# Altium PCB PCB1.PcbDoc
Units mil, origin at the board's own origin, x right, y up, seen from the top; angles counter-clockwise.
Board outline 3385.83 x 2125.98 mil, 2 copper layers (Top Layer, Bottom Layer), stack 34.296 mil thick; 5 components, 5 nets, 17 pads, 0 vias.
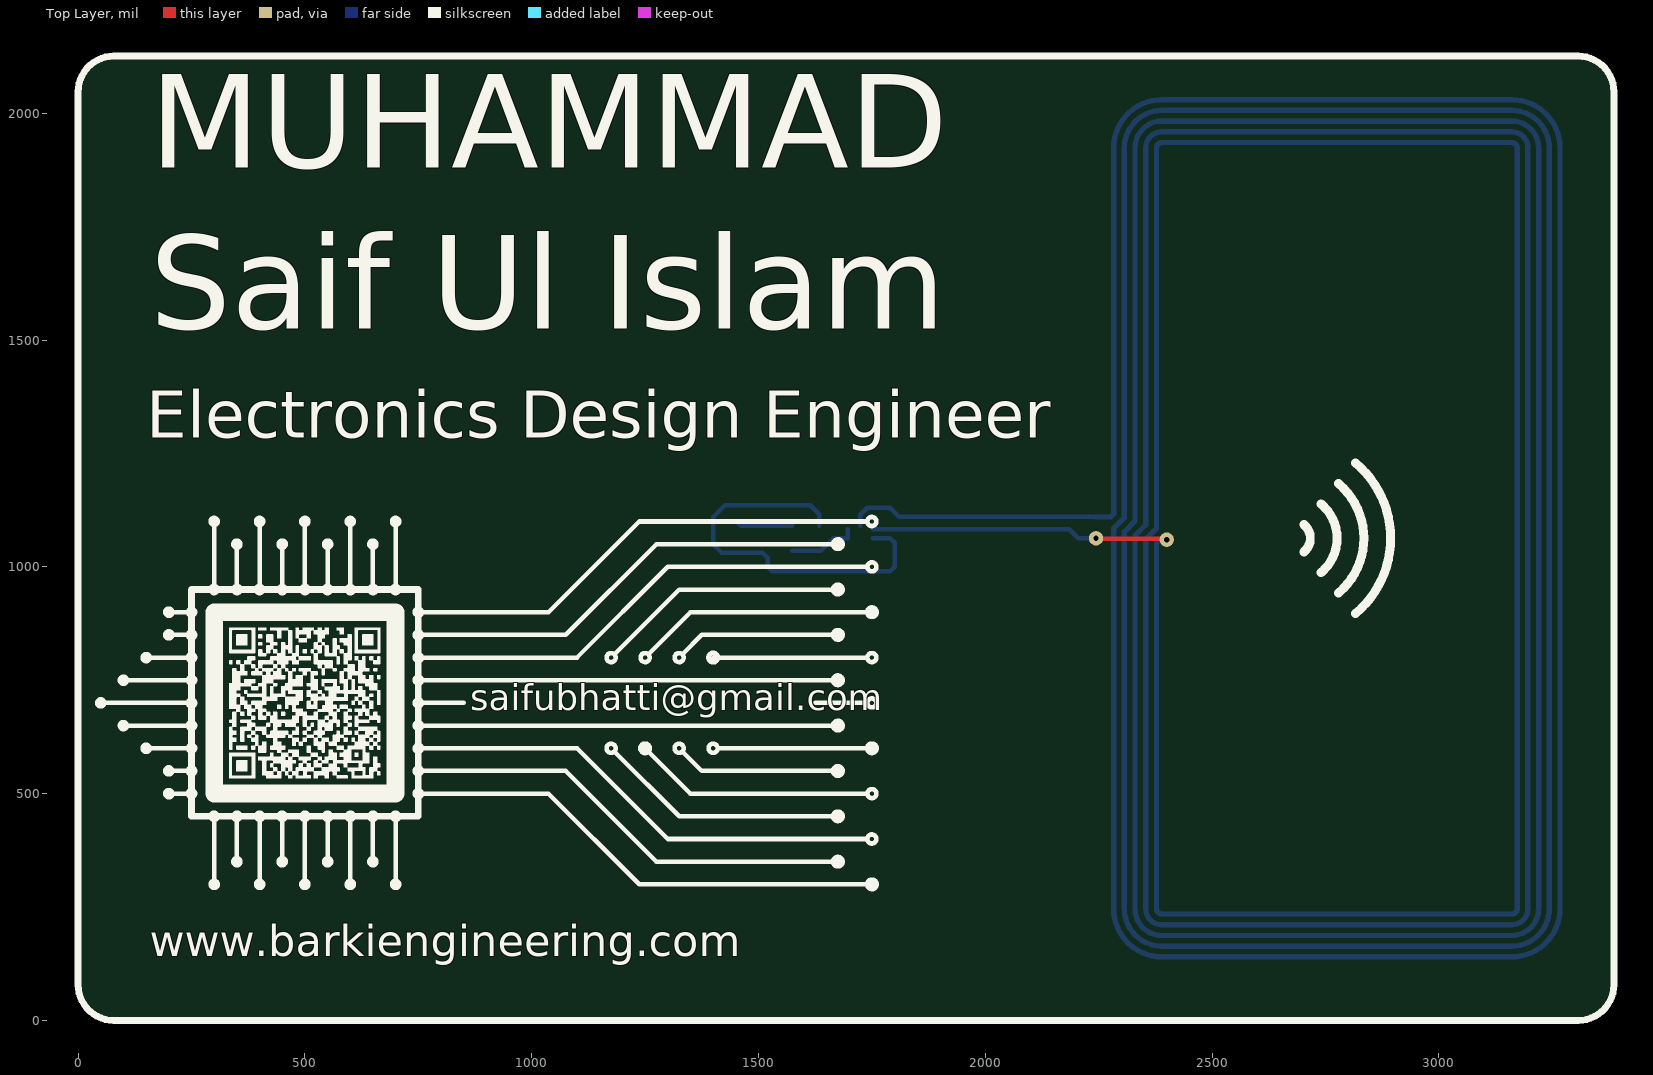
[diagram p0: Top Layer view]
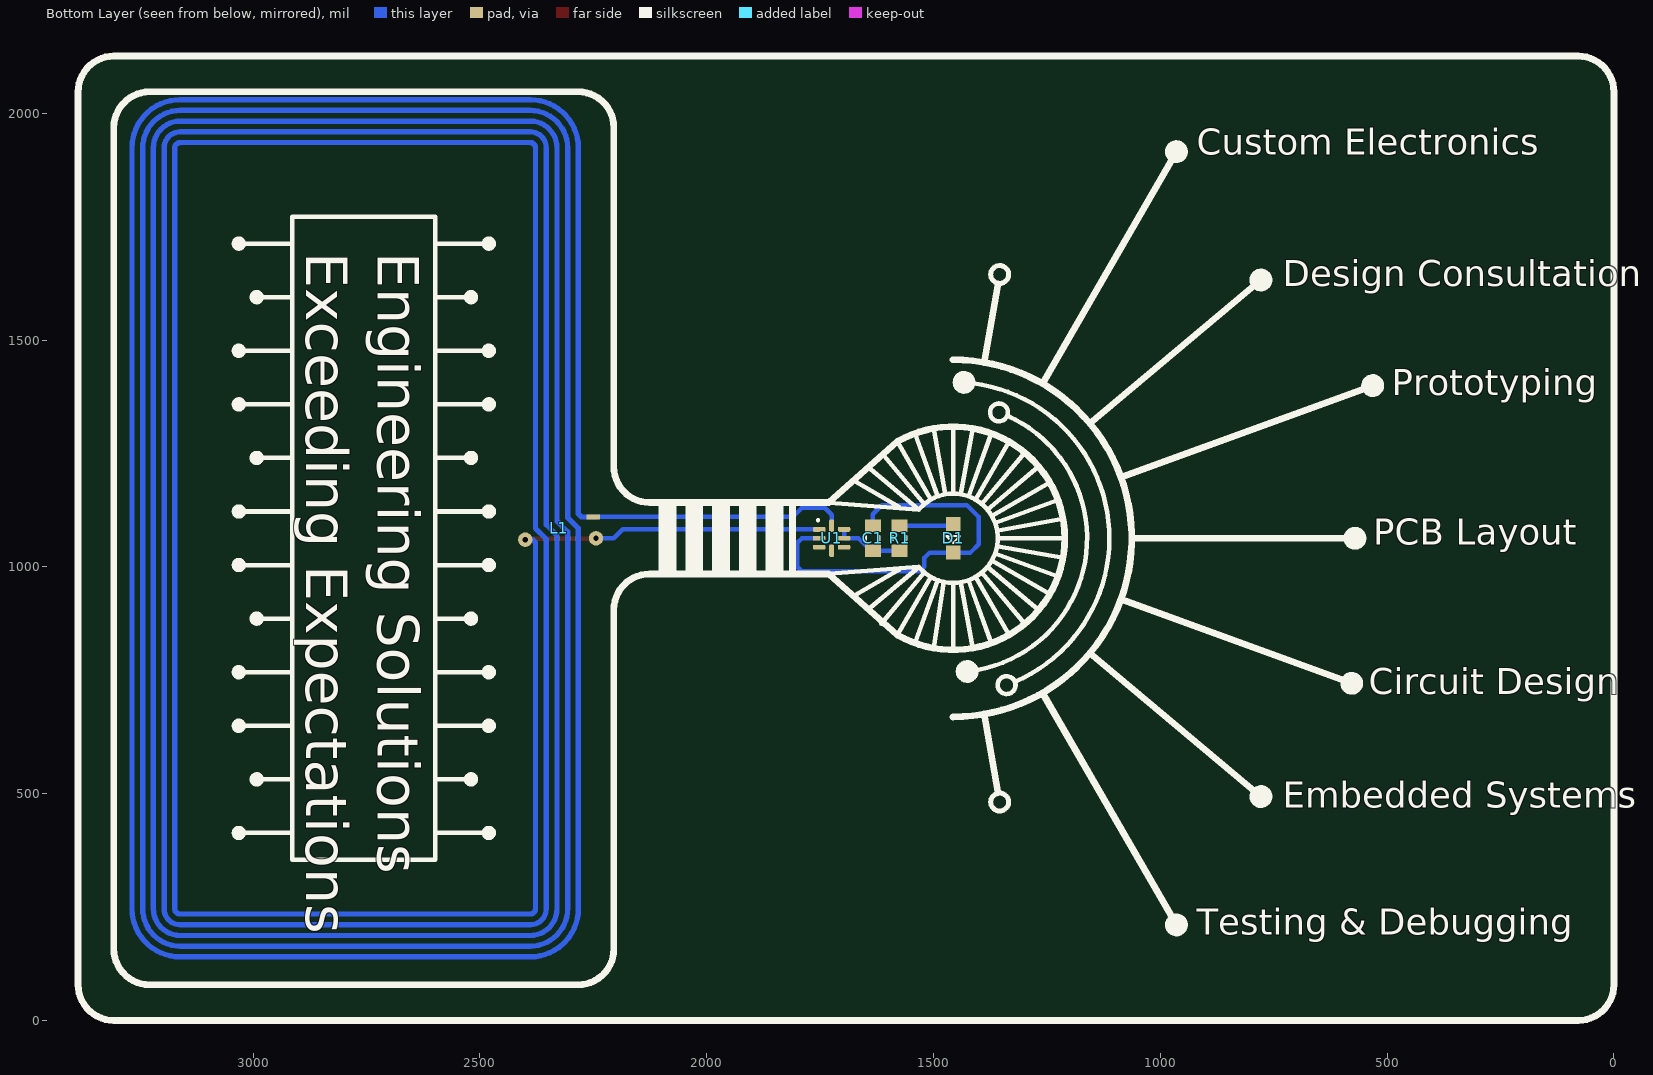
[diagram p1: Bottom Layer view, seen from below]
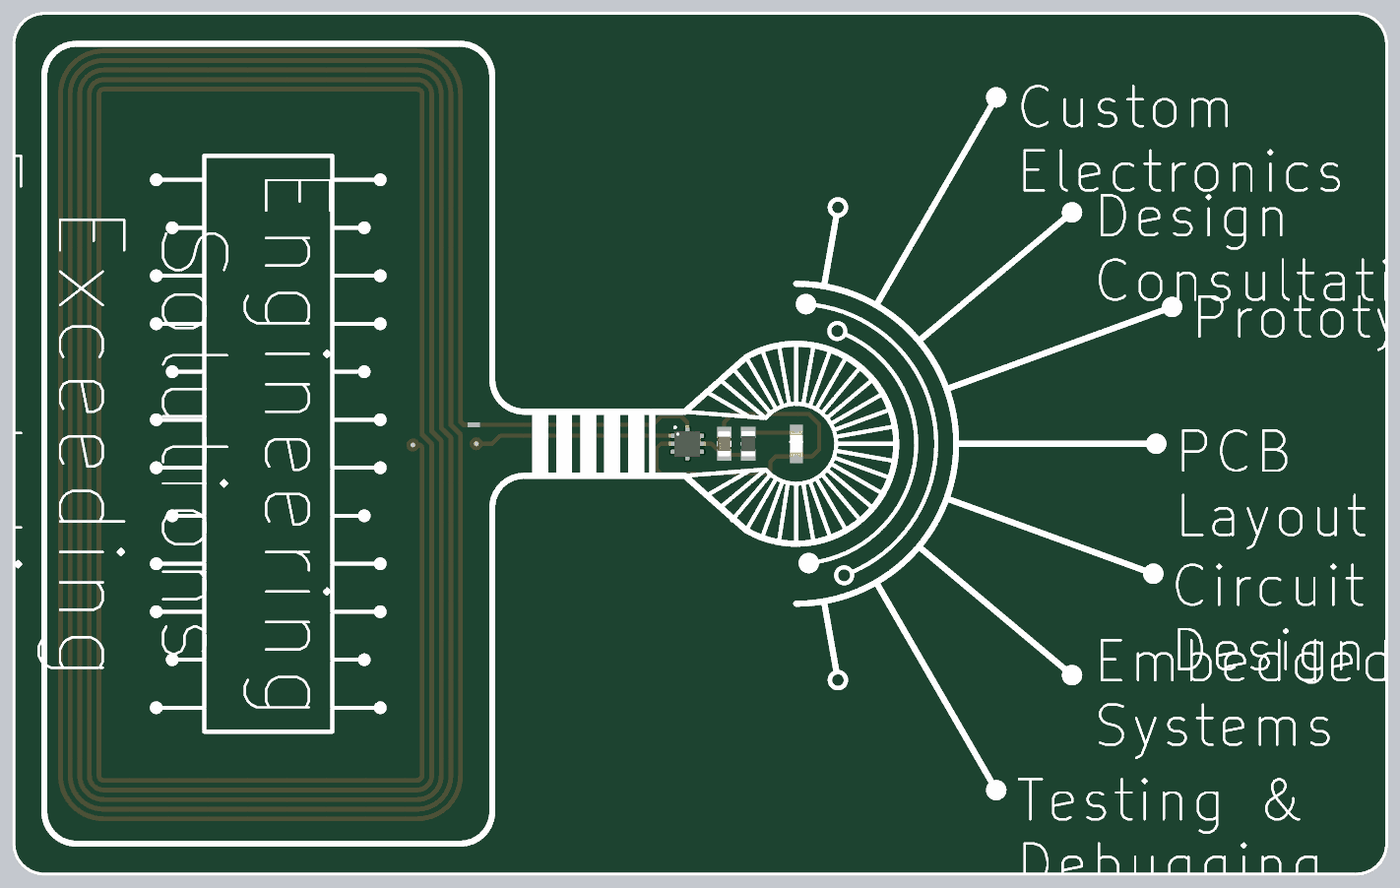
[diagram p2: 3D render of the assembled board from below, using the file's embedded part models]

## Layer stack, top to bottom
Top Solder: solder mask 0.4, Solder Resist, Dk 3.5
Top Layer: signal copper 1.4
Dielectric 1: dielectric 31.4961, FR-4, Dk 4.8
Bottom Layer: signal copper 1.4
Bottom Solder: solder mask 0.4, Solder Resist, Dk 3.5

## Board outline
0,78.74 0,2047.24 cw(c78.74,2047.24) 78.74,2125.98 3307.09,2125.98 cw(c3307.09,2047.24) 3385.83,2047.24 3385.83,78.74 cw(c3307.09,78.74) 3307.09,0 78.74,0 cw(c78.74,78.74)

## Design rules (kind name [scope] priority, off if disabled: settings)
Clearance [All] p1: gap=6 ignorepadtopadclearanceinfootprint=TRUE
MinimumSolderMaskSliver [All] p1: minsoldermaskwidth=0
PolygonConnect [All] p1: connectstyle=Relief reliefconductorwidth=10 reliefentries=4 polygonreliefangle="90 Angle" airgapwidth=10
RoutingVias [All] p1: holewidth=28 width=50 viastyle="Through Hole" minholewidth=28 minwidth=50 maxholewidth=28 maxwidth=50
SilkToSolderMaskClearance [IsPad] p1: minsilkscreentomaskgap=3 clearancetoexposedcopper=TRUE
SolderMaskExpansion [All] p1: expansion=4 istentingtop=FALSE
Width [All] p1: maxlimit=196.85 minlimit=5 preferedwidth=10
28 further rules are at their usual default settings.

## Components (designator, comment, footprint, x,y, rotation, side; value= is the part's Value field where it differs from the comment)
C1 "0.1uF" C_0603 1633.86,1062.99 r270 bottom
D1 "Yellow" LED_0603 1456.69,1062.99 r270 bottom
L1 "NFC Antenna" 25X48MM_NFC_ANTENNA 2775,1085 r270 bottom locked
R1 "47R" R_0603 1574.8,1062.99 r270 bottom
U1 "NT3H2111W0FHKH" XFQFN-8 1724.61,1062.99 r180 bottom

## Footprints (in the part's own frame and the unit in brackets; to place one, negate y for a bottom-side part, rotate by r counter-clockwise, add the part's x,y. Pads: shape width x height; smd on the part's side, far side on the other; paste and mask are expansions set on the pad)
25X48MM_NFC_ANTENNA [mil]
  rect 11.81x29.53 smd mask+4: 1(-25,525)
  round 31.81 hole 11.81 mask+4: 2(25,375)
  Top Layer lines w11.81: -25,530 -25,525 -25,498.62 -31.5,492.13 -838.58,492.13 ccw(c-838.58,385.83) -944.88,385.83 -944.88,-385.83 ccw(c-838.58,-385.83) -838.58,-492.13 838.58,-492.13 ccw(c838.58,-385.83) 944.88,-385.83 944.88,385.83 ccw(c838.58,385.83) 838.58,492.13 0,492.13 -23.62,468.5 -838.58,468.5 ccw(c-838.58,385.82) -921.26,385.83 -921.26,-385.83 ccw(c-838.59,-385.82) -838.58,-468.5 838.58,-468.5 ccw(c838.58,-385.82) 921.26,-385.83 921.26,385.83 ccw(c838.59,385.82) 838.58,468.5 7.87,468.5 -15.75,444.88 -838.58,444.88 ccw(c-838.58,385.82) -897.64,385.83 -897.64,-385.83 ccw(c-838.59,-385.82) -838.58,-444.88 838.58,-444.88 ccw(c838.58,-385.82) 897.64,-385.83 897.64,385.83 ccw(c838.59,385.82) 838.58,444.88 15.75,444.88 -7.87,421.26 -838.58,421.26 ccw(c-838.58,385.82) -874.02,385.83 -874.02,-385.83 ccw(c-838.59,-385.82) -838.58,-421.26 838.58,-421.26 ccw(c838.58,-385.82) 874.02,-385.83 874.02,385.83 ccw(c838.59,385.82) 838.58,421.26 23.62,421.26 0,397.64 -838.58,397.64 ccw(c-838.58,385.83) -850.39,385.83 -850.39,-385.83 ccw(c-838.58,-385.83) -838.58,-397.64 838.58,-397.64 ccw(c838.58,-385.83) 850.39,-385.83 850.39,385.83 ccw(c838.58,385.83) 838.58,397.64 31.5,397.64 25,391.14 25,375
C_0603 [mm]
  rect 0.7x0.9 smd paste+0 mask+0: 1(-0.7,0) 2(0.7,0)
  silkscreen extent -0.13,-0.38 0.13,0.38, body extent -0.8,-0.4 0.8,0.4, height 1
LED_0603 [mm]
  rect 0.8x0.8 smd paste+0 mask+0: 1(-0.8,0) 2(0.8,0)
  silkscreen extent -0.13,-0.38 0.25,0.38, body extent -0.8,-0.4 0.8,0.4, height 0.7
R_0603 [mm]
  rect 0.7x0.9 smd paste+0 mask+0: 1(-0.7,0) 2(0.7,0)
  silkscreen extent -0.13,-0.39 0.09,0.38, body extent -0.77,-0.43 0.77,0.43, height 0.5
XFQFN-8 [mm]
  rrect54% 0.71x0.27 smd: 1(-0.695,0.5) 2(-0.695,0)
  rrect54% 0.7x0.27 smd: 3(-0.695,-0.5) 5(0.695,-0.5) 6(0.695,0) 7(0.695,0.5)
  rrect54% 0.27x0.7 smd: 4(0,-0.695) 8(0,0.695)
  silkscreen extent -0.78,1 -0.74,1.04, body extent -0.8,-0.8 0.8,0.8, height 0.5

## Part data
C1: library part "Cap 0.1uF 50V 10% X7R 0603", "Ceramic Capacitor 0.1uF 10% X7R 50V 0603 T/R", Manufacturer=Samsung, Manufacturer Part Number=CL10B104KB8WPND, Supplier Part Number 1=187-CL10B104KB8WPND, Category="Ceramic Capacitors", Pricing 1="1=0.10000, 10=0.03400, 50=0.03400, 100=0.02600, 1000=0.01500, 10000=0.01100 (USD)", RoHS=Yes, RoHS Compliant=Yes, Stock 1=31698, Supplier 1=Mouser
D1: library part "LED Yellow 2V 20mA 0603", "APT1608SYCK Yellow LED; 590 nm 1608 (0603) Clear; Rectangle Lens SMD package", Case Code (Imperial)=0603, Case Code (Metric)=1608, Forward Current=20mA, Forward Voltage=2V, Lens Color=Clear, Manufacturer=Kingbright, Manufacturer Part Number=APT1608SYCK, Max Operating Temperature=85°C, Min Operating Temperature=-40°C, Package Quantity=2000, Supplier Part Number 1=754-1124-1-ND, Case/Package=0603, Category=LEDs, Color=Yellow, ComponentLink1Description=https://datasheet.ciiva.com/2113/apt1608syck-2113824.pdf?src-supplier=Digi-Key, ComponentLink1URL=https://datasheet.ciiva.com/2113/apt1608syck-2113824.pdf?src-supplier=Digi-Key, ComponentLink2Description=https://datasheet.ciiva.com/4688/apt1608syck-35136-4688900.pdf?src-supplier=Mouser, ComponentLink2URL=https://datasheet.ciiva.com/4688/apt1608syck-35136-4688900.pdf?src-supplier=Mouser, ComponentLink3Description=https://datasheet.ciiva.com/2113/apt1608syck-2113825.pdf?src-supplier=Digi-Key, ComponentLink3URL=https://datasheet.ciiva.com/2113/apt1608syck-2113825.pdf?src-supplier=Digi-Key, ComponentLink4Description=https://datasheet.ciiva.com/2113/apt1608syck-2113826.pdf?src-supplier=Digi-Key, ComponentLink4URL=https://datasheet.ciiva.com/2113/apt1608syck-2113826.pdf?src-supplier=Digi-Key, ComponentLink5Description=https://datasheet.ciiva.com/14603/70062842-14603786.pdf?src-supplier=Allied+Electronics, ComponentLink5URL=https://datasheet.ciiva.com/14603/70062842-14603786.pdf?src-supplier=Allied+Electronics, Dominant Wavelength=590nm, Height=0.75mm, Illumination Color=Yellow, Lead Free="Lead Free", Length=1.6mm, Lens Style=Clear,Flat, Luminous Intensity=150mcd, Mounting Technology="Surface Mount", Number of LEDs=1, Packaging="Tape and Reel", Pins=2, Pricing 1="1=0.29000, 10=0.22800, 100=0.10230, 500=0.09240, 1000=0.07590 (USD)", RoHS=Yes, RoHS Compliant=Yes, Series=APT, Stock 1=209827, Supplier 1=Digi-Key, Test Current=20mA, Viewing Angle=120°, Wavelength=590nm, Width=0.8mm
L1: library part "Antenna NFC 25X48MM", "Antenna for NFC"
R1: library part "Res 47R 1% 1/5W 0603", "YAGEO (PHYCOMP)         RC0603FR-7W47RL             SMD Chip Resistor, Thick Film, 47 ohm, 50 V, 0603 [1608 Metric], 100 mW,  1%, RC Series", Case Code (Imperial)=0603, Case Code (Metric)=1608, Manufacturer=Yageo, Manufacturer Part Number=RC0603FR-7W47RL, Power Rating=100mW, Resistance Tolerance=1%, Resistor Type="Thick Film", Supplier Part Number 1=603-RC0603FR-7W47RL, Temperature Coefficient=100ppm/°C, Voltage Rating=50V, Case/Package=0603, Category="Chip SMD Resistors", ComponentLink1Description=http://www.farnell.com/datasheets/1675737.pdf?src-supplier=Farnell, ComponentLink1URL=http://www.farnell.com/datasheets/1675737.pdf?src-supplier=Farnell, ComponentLink2Description=http://www.farnell.com/datasheets/1675737.pdf?src-supplier=Element14, ComponentLink2URL=http://www.farnell.com/datasheets/1675737.pdf?src-supplier=Element14, Number of Pins=2, Packaging="Cut Tape", Pricing 1="1=0.10000, 10=0.03700, 50=0.03700, 100=0.01500, 1000=0.00700, 10000=0.00400 (USD)", Resistance=47R, RoHS=Yes, RoHS Compliant=Yes, Series=RC0603, Stock 1=5673, Supplier 1=Mouser, Tolerance=1%, Voltage Rating (DC)=50V
U1: library part "IC RFID Transponder 13.56MHz XQFN-8", "NFC/RFID Tag and Transponder IC 13560kHz 1KByte Automotive 8-Pin XQFN EP T/R", Frequency=13.56MHz, Manufacturer="NXP Semiconductors", Max Operating Temperature=105°C, Min Operating Temperature=-40°C, Supplier Part Number=771-NT3H2111W0FHKH, Category="Integrated Circuits (ICs)", ComponentLink1Description=http://www.farnell.com/datasheets/2148700.pdf?src-supplier=Farnell, ComponentLink1URL=http://www.farnell.com/datasheets/2148700.pdf?src-supplier=Farnell, ComponentLink2Description=http://www.mouser.com/ds/2/302/NT3H2111_2211-888244.pdf?src-supplier=Mouser, ComponentLink2URL=http://www.mouser.com/ds/2/302/NT3H2111_2211-888244.pdf?src-supplier=Mouser, ComponentLink3Description=http://www.farnell.com/datasheets/2148700.pdf?src-supplier=Newark, ComponentLink3URL=http://www.farnell.com/datasheets/2148700.pdf?src-supplier=Newark, ComponentLink4Description=https://www.nxp.com/docs/en/data-sheet/NT3H2111_2211.pdf?src-supplier=Digikey, ComponentLink4URL=https://www.nxp.com/docs/en/data-sheet/NT3H2111_2211.pdf?src-supplier=Digikey, ComponentLink5Description=http://cache.nxp.com/documents/data_sheet/NT3H2111_2211.pdf?src-supplier=Digikey, ComponentLink5URL=http://cache.nxp.com/documents/data_sheet/NT3H2111_2211.pdf?src-supplier=Digikey, ComponentLink6Description=https://datasheet.octopart.com/NT3H2111W0FHKH-NXP-Semiconductors-datasheet-62111411.pdf?src-supplier=Newark, ComponentLink6URL=https://datasheet.octopart.com/NT3H2111W0FHKH-NXP-Semiconductors-datasheet-62111411.pdf?src-supplier=Newark, Interface=I2C, Lead Free="Lead Free", Manufacturer Part Number=NT3H2111W0FHKH, Packaging="Cut Tape", Pricing="1=1.31, 10=1.09, 50=1.09, 100=0.833, 1000=0.581, 10000=0.493 (USD)", RoHS=Yes, RoHS Compliant=Yes, Series=-, Stock=20122, Supplier=Mouser

## Free pads (board coordinates)
  round 31.81 hole 11.81 mask+4: 2(2244.09,1062.99)

## Nets (pads, with @x,y where several pads share a name; then routed paths per layer and width w, separated by ;. In a path a pad name is that pad's centre, name@x,y a point inside that pad or via, vN(x,y) a via of type N, cw(c..) or ccw(c..) an arc to the next point about the centre after c; other vN are vias at no path point)
GND: C1.1 D1.2 U1.2 | length 884.4
  Bottom Layer w10: C1.1 1633.86,1116.14 1613.86,1136.14 1426.14,1136.14 1400,1110 1400,1050 1418.5,1031.5 1508.5,1031.5 1520,1020 1520,1000 1530,990 1790,990 1800,1000 1800,1052.99 1790,1062.99 U1.2
NetC1_2: C1.2 R1.2 U1.6 U1.7 | length 153.5
  Bottom Layer w10: R1.2 C1.2 1637.8,1035.43 1665.35,1062.99 U1.6 U1.7
NetD1_1: D1.1 R1.1 | length 119.7
  Bottom Layer w10: D1.1 1460.63,1090.55 R1.1
NetL1_1: L1.1 U1.8 | length 564.3
  Bottom Layer w10: U1.8 1724.61,1114.61 1740,1130 1790,1130 1810,1110 L1.1
NetL1_2: L1.2 pad.2 U1.1 | length 656.8
  Top Layer w10: pad.2@2244.09,1061.5 L1.2@2398.5,1061.5
  Top Layer w15: L1.2@2398.5,1061.5 L1.2
  Bottom Layer w10: U1.1 2185.04,1082.68 2204.72,1062.99 pad.2
pads on no net: U1.3 U1.4 U1.5

## Silkscreen, mask and mechanical layers (free items; w line width, h text height)
Top Overlay:
  drawing of 306 lines, arcs and shapes, not listed
  text "MUHAMMAD  / Saif Ul Islam" at 157.48,1456.69 h354.33
  text "Electronics Design Engineer" at 150,1250 h177.17
  text "saifubhatti@gmail.com" at 865,665 h98.43
  text "www.barkiengineering.com" at 157.48,118.11 h118.11
Bottom Overlay:
  drawing of 150 lines, arcs and shapes, not listed
  text "Custom Electronics" at 920,1890 h98.43
  text "Engineering Solutions / Exceeding Expectations" at 2913.39,1693.27 h157.48 r90
  text "Design Consultation" at 730,1600 h98.43
  text "Prototyping" at 490,1360 h98.43
  text "PCB Layout" at 530,1030 h98.43
  text "Circuit Design" at 540,700 h98.43
  text "Embedded Systems" at 730,450 h98.43
  text "Testing & Debugging" at 920,170 h98.43
Mechanical 1:
  the board outline again, w10
Drill Drawing:
  lines w10: -142.71,2662.5 -76.04,2662.5 -76.04,2729.17 -142.71,2729.17 -142.71,2662.5
  lines w15: -202.5,2617.5 10188.63,2617.5 ; -202.5,2767.5 10188.63,2767.5 ; 348.38,2467.5 348.38,2917.5 ; 828.26,2467.5 828.26,2917.5 ; 1897.95,2467.5 1897.95,2917.5 ; 2403.82,2467.5 2403.82,2917.5 ; 3137.62,2467.5 3137.62,2917.5 ; 4637.17,2467.5 4637.17,2917.5 ; 5227.02,2467.5 5227.02,2917.5 ; 5972.82,2467.5 5972.82,2917.5 ; 6622.65,2467.5 6622.65,2917.5 ; 7476.41,2467.5 7476.41,2917.5 ; 8810.02,2467.5 8810.02,2917.5 ; -202.5,2467.5 10188.63,2467.5 10188.63,2917.5 -202.5,2917.5 -202.5,2467.5
  text "Symbol" at -112.5,2812.5 h72
  text "Count" at 393.38,2812.5 h72
  text "Hole Size" at 873.26,2812.5 h72
  text "Plated" at 1942.95,2812.5 h72
  text "Hole Type" at 2448.82,2812.5 h72
  text "Drill Layer Pair" at 3182.62,2812.5 h72
  text "Via/Pad" at 4682.17,2812.5 h72
  text "Pad Shape" at 5272.02,2812.5 h72
  text "Template" at 6017.82,2812.5 h72
  text "Description" at 6667.65,2812.5 h72
  text "Hole Tolerance (+)" at 7521.41,2812.5 h72
  text "Hole Tolerance (-)" at 8855.02,2812.5 h72
  text "2" at 393.38,2662.5 h60
  text "11.81mil (0.300mm)" at 873.26,2662.5 h60
  text "PTH" at 1942.95,2662.5 h60
  text "Round" at 2448.82,2662.5 h60
  text "Top Layer - Bottom Layer" at 3182.62,2662.5 h60
  text "Pad" at 4682.17,2662.5 h60
  text "Rounded" at 5272.02,2662.5 h60
  text "(Mixed)" at 6017.82,2662.5 h60
  text "2 Total" at 393.38,2512.5 h60

## Dimensions
0,0 to 78.74,2125.98 on Dimensions
0,0 to 3385.83,78.74 on Dimensions